# Altium PCB camera.PcbDoc
Units mm, origin at the board's own origin, x right, y up, seen from the top; angles counter-clockwise.
Board outline 152.4 x 101.6 mm, 2 copper layers (Top Layer, Bottom Layer); 45 components, 38 nets, 270 pads, 0 vias.
Unrouted connection lines stored in the file: 134.
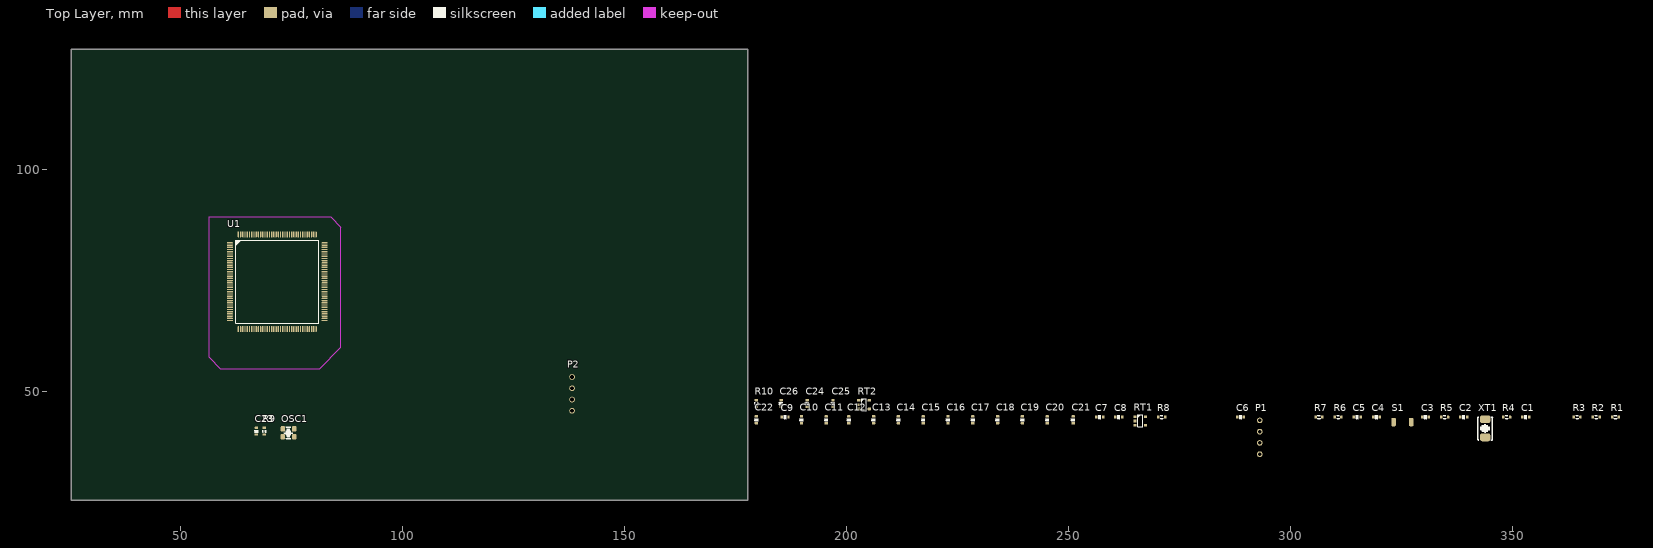
[diagram p0: Top Layer view]
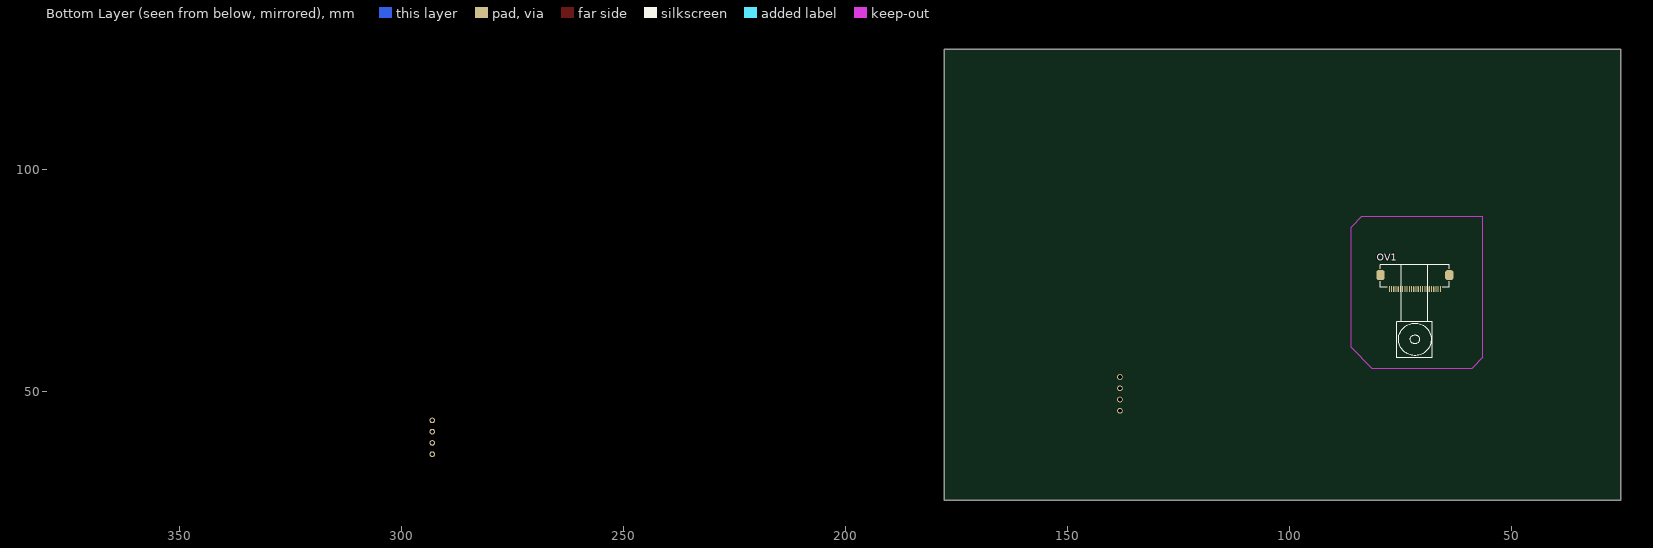
[diagram p1: Bottom Layer view, seen from below]

## Layer stack, top to bottom
Top Solder: solder mask 0.0102, Solder Resist, Dk 3.5
Top Layer: signal copper 0.0356
Dielectric1: dielectric 0.32, FR-4, Dk 4.8
Bottom Layer: signal copper 0.0356
Bottom Solder: solder mask 0.0102, Solder Resist, Dk 3.5

## Board outline
25.4,25.4 177.8,25.4 177.8,127 25.4,127

## Design rules (kind name [scope] priority, off if disabled: settings)
Clearance [All] p1: gap=0.152 ignorepadtopadclearanceinfootprint=FALSE
PolygonConnect [All] p1: connectstyle=Relief reliefconductorwidth=0.254 reliefentries=4 polygonreliefangle="90 Angle" airgapwidth=0.254
RoutingVias [All] p1: holewidth=0.711 width=1.27 viastyle="Through Hole" minholewidth=0.711 minwidth=1.27 maxholewidth=0.711 maxwidth=1.27
SolderMaskExpansion [All] p1: expansion=0.102
Width [All] p1: maxlimit=0.254 minlimit=0.254 preferedwidth=0.254
30 further rules are at their usual default settings.

## Components (designator, comment, footprint, x,y, rotation, side; value= is the part's Value field where it differs from the comment)
C1 "Cap_0603" CAP_0603 353.06,44.196 r0 top value=20pf
C2 "Cap_0603" CAP_0603 339.09,44.196 r0 top value=20pf
C3 "Cap_0603" CAP_0603 330.454,44.196 r0 top value=0.1u
C4 "Cap_0603" CAP_0603 319.405,44.196 r0 top value=0.1u
C5 "Cap_0603" CAP_0603 315.087,44.196 r0 top value=0.1u
C6 "Cap_0603" CAP_0603 288.798,44.196 r0 top value=0.1u
C7 "Cap_0603" CAP_0603 257.048,44.196 r0 top value=1u
C8 "Cap_0603" CAP_0603 261.366,44.196 r0 top value=0.1u
C9 "Cap_0603" CAP_0603 186.182,44.196 r0 top value=0.1u
C10 "Cap_0603" CAP_0603 189.865,43.561 r90 top value=0.1u
C11 "Cap_0603" CAP_0603 195.453,43.561 r90 top value=0.1u
C12 "Cap_0603" CAP_0603 200.533,43.561 r90 top value=0.1u
C13 "Cap_0603" CAP_0603 206.121,43.561 r90 top value=0.1u
C14 "Cap_0603" CAP_0603 211.709,43.561 r90 top value=0.1u
C15 "Cap_0603" CAP_0603 217.297,43.561 r90 top value=0.1u
C16 "Cap_0603" CAP_0603 222.885,43.561 r90 top value=0.1u
C17 "Cap_0603" CAP_0603 228.473,43.561 r90 top value=0.1u
C18 "Cap_0603" CAP_0603 234.061,43.561 r90 top value=0.1u
C19 "Cap_0603" CAP_0603 239.649,43.561 r90 top value=0.1u
C20 "Cap_0603" CAP_0603 245.237,43.561 r90 top value=0.1u
C21 "Cap_0603" CAP_0603 251.079,43.561 r90 top value=0.1u
C22 "Cap_0603" CAP_0603 179.705,43.561 r90 top value=22n
C23 "Cap_0603" CAP_0603 67.056,41.021 r90 top value=0.1u
C24 "Cap_0603" CAP_0603 191.135,47.244 r90 top value=1u
C25 "Cap_0603" CAP_0603 196.977,47.244 r90 top value=0.1u
C26 "Cap_0603" CAP_0603 185.293,47.244 r90 top value=22n
OSC1 "OSC_3225_4P" XT_3225_4 74.295,40.64 r0 top value=?MHz
OV1 "OV7725" ov7725 71.882,68.453 r0 bottom
P1 "HDR1x4_2.54" HDR1X4_2.54_90 293.116,43.434 r0 top
P2 "HDR1x4_2.54" HDR1X4_2.54_90 138.176,53.213 r0 top
R1 "Res_0603" RES_0603 373.253,44.196 r0 top value=10K
R2 "Res_0603" RES_0603 368.935,44.196 r0 top value=10K
R3 "Res_0603" RES_0603 364.617,44.196 r0 top value=10K
R4 "Res_0603" RES_0603 348.742,44.196 r0 top value=1M
R5 "Res_0603" RES_0603 334.772,44.196 r0 top value=10K
R6 "Res_0603" RES_0603 310.769,44.196 r0 top value=10K
R7 "Res_0603" RES_0603 306.451,44.196 r0 top value=10K
R8 "Res_0603" RES_0603 271.018,44.196 r0 top value=10K
R9 "Res_0603" RES_0603 68.834,41.021 r90 top value=10K
R10 "Res_0603" RES_0603 179.705,47.244 r90 top value=10K
RT1 "RT9193" SOT23-5 266.192,43.307 r0 top
RT2 "RT9193" SOT23-5 203.962,46.99 r0 top
S1 "ButtonTACT_3x4x2_180" ButtonTACT_3x4x2_180H 325.247,43.053 r0 top
U1 "STM32F407ZGET6" LQFP_P0.5_144 71.755,74.676 r0 top
XT1 "XTAL_5032_2P" XT_5032_2 343.916,41.656 r90 top value=8M

## Footprints (in the part's own frame and the unit in brackets; to place one, negate y for a bottom-side part, rotate by r counter-clockwise, add the part's x,y. Pads: shape width x height; smd on the part's side, far side on the other; paste and mask are expansions set on the pad)
ButtonTACT_3x4x2_180H [mil]
  round 0 hole 28: 0(0,-35) 0(0,35)
  rrect50% 40x74 smd: 1(-78,0) 2(78,0)
  body extent -79,-49 79,49, height 63
CAP_0603 [mil]
  rrect50% 22x30 smd: 1(-30,0) 2(30,0)
  silkscreen extent -10,-15 10,15, body extent -31,-16 31,16, height 31
HDR1X4_2.54_90 [mil]
  round 50 hole 32: 1(0,0) 2(0,-100) 3(0,-200) 4(0,-300)
  body extent -15,-346 424,46, height 99
LQFP_P0.5_144 [mil]
  oval 54x12 smd: 1(-420,344.49) 2(-420,324.8) 3(-420,305.12) 4(-420,285.43) 5(-420,265.75) 6(-420,246.06) 7(-420,226.38) 8(-420,206.69) 9(-420,187.01) 10(-420,167.32) 11(-420,147.64) 12(-420,127.95) 13(-420,108.27) 14(-420,88.58) 15(-420,68.9) 16(-420,49.21) 17(-420,29.53) 18(-420,9.84) 19(-420,-9.84) 20(-420,-29.53) 21(-420,-49.21) 22(-420,-68.9) 23(-420,-88.58) 24(-420,-108.27) 25(-420,-127.95) 26(-420,-147.64) 27(-420,-167.32) 28(-420,-187.01) 29(-420,-206.69) 30(-420,-226.38) 31(-420,-246.06) 32(-420,-265.75) 33(-420,-285.43) 34(-420,-305.12) 35(-420,-324.8) 36(-420,-344.49) 73(420,-344.49) 74(420,-324.8) 75(420,-305.12) 76(420,-285.43) 77(420,-265.75) 78(420,-246.06) 79(420,-226.38) 80(420,-206.69) 81(420,-187.01) 82(420,-167.32) 83(420,-147.64) 84(420,-127.95) 85(420,-108.27) 86(420,-88.58) 87(420,-68.9) 88(420,-49.21) 89(420,-29.53) 90(420,-9.84) 91(420,9.84) 92(420,29.53) 93(420,49.21) 94(420,68.9) 95(420,88.58) 96(420,108.27) 97(420,127.95) 98(420,147.64) 99(420,167.32) 100(420,187.01) 101(420,206.69) 102(420,226.38) 103(420,246.06) 104(420,265.75) 105(420,285.43) 106(420,305.12) 107(420,324.8) 108(420,344.49)
  oval 12x54 smd: 37(-344.49,-420) 38(-324.8,-420) 39(-305.12,-420) 40(-285.43,-420) 41(-265.75,-420) 42(-246.06,-420) 43(-226.38,-420) 44(-206.69,-420) 45(-187.01,-420) 46(-167.32,-420) 47(-147.64,-420) 48(-127.95,-420) 49(-108.27,-420) 50(-88.58,-420) 51(-68.9,-420) 52(-49.21,-420) 53(-29.53,-420) 54(-9.84,-420) 55(9.84,-420) 56(29.53,-420) 57(49.21,-420) 58(68.9,-420) 59(88.58,-420) 60(108.27,-420) 61(127.95,-420) 62(147.64,-420) 63(167.32,-420) 64(187.01,-420) 65(206.69,-420) 66(226.38,-420) 67(246.06,-420) 68(265.75,-420) 69(285.43,-420) 70(305.12,-420) 71(324.8,-420) 72(344.49,-420) 109(344.49,420) 110(324.8,420) 111(305.12,420) 112(285.43,420) 113(265.75,420) 114(246.06,420) 115(226.38,420) 116(206.69,420) 117(187.01,420) 118(167.32,420) 119(147.64,420) 120(127.95,420) 121(108.27,420) 122(88.58,420) 123(68.9,420) 124(49.21,420) 125(29.53,420) 126(9.84,420) 127(-9.84,420) 128(-29.53,420) 129(-49.21,420) 130(-68.9,420) 131(-88.58,420) 132(-108.27,420) 133(-127.95,420) 134(-147.64,420) 135(-167.32,420) 136(-187.01,420) 137(-206.69,420) 138(-226.38,420) 139(-246.06,420) 140(-265.75,420) 141(-285.43,420) 142(-305.12,420) 143(-324.8,420) 144(-344.49,420)
  silkscreen extent -370,-370 370,370, body extent -433,-433 433,433, height 63
ov7725 [mil]
  rrect50% 72x86 smd: 0(-311,-304) 0(299,-304)
  rrect50% 10x50 smd: 1(-232.38,-180.02) 2(-212.69,-180.02) 3(-193.01,-180.02) 4(-173.32,-180.02) 5(-153.64,-180.02) 6(-133.95,-180.02) 7(-114.27,-180.02) 8(-94.58,-180.02) 9(-74.9,-180.02) 10(-55.21,-180.02) 11(-35.53,-180.02) 12(-15.84,-180.02) 13(3.84,-180.02) 14(23.53,-180.02) 15(43.21,-180.02) 16(62.9,-180.02) 17(82.58,-180.02) 18(102.27,-180.02) 19(121.95,-180.02) 20(141.64,-180.02) 21(161.32,-180.02) 22(181.01,-180.02) 23(200.69,-180.02) 24(220.38,-180.02)
  silkscreen extent -311,-394 299,431, body extent -350,-399 338,-189, height 82
RES_0603 [mil]
  rrect50% 22x30 smd: 1(-30,0) 2(30,0)
  silkscreen extent -10,-16 10,16, body extent -31,-16 31,16, height 18
SOT23-5 [mil]
  rrect50% 30x24 smd: 1(-47,38) 2(-47,0) 3(-47,-38) 4(47,-38) 5(47,38)
  silkscreen extent -21,-53 21,53, body extent -55,-57 55,57, height 57
XT_3225_4 [mil]
  rrect50% 40x48 smd: 1(-50,-35) 2(50,-35) 3(50,35) 4(-50,35)
  silkscreen extent -38,-54 38,54, body extent -63,-49 63,49, height 41
XT_5032_2 [mil]
  rrect50% 70x90 smd: 1(-80,0) 2(80,0)
  silkscreen extent -104,-68 104,68, body extent -98,-63 98,63, height 39

## Part data
C1 C2 C3 C4 C5 C6 C7 C8 C9 C10 C11 C12 C13 C14 C15 C16 C17 C18 C19 C20 C21 C22 C23 C24 C25 C26: "Capacitor"
OSC1 XT1: "Crystal Oscillator"
P1 P2: "Header"
R1 R2 R3 R4 R5 R6 R7 R8 R9 R10: "Resistor"
RT1 RT2: "Power"
S1: "Button"
U1: library part Component_1

## Nets (pads, with @x,y where several pads share a name; then routed paths per layer and width w, separated by ;. In a path a pad name is that pad's centre, name@x,y a point inside that pad or via, vN(x,y) a via of type N, cw(c..) or ccw(c..) an arc to the next point about the centre after c; other vN are vias at no path point)
1V8: C8.2 OV1.10 RT1.5
2V8: C25.2 OV1.4 OV1.11 RT2.5
3V3: C6.1 C7.2 C9.2 C10.2 C11.2 C12.2 C13.2 C14.2 C15.2 C16.2 C17.2 C18.2 C19.2 C20.2 C21.2 C23.2 C24.2 OSC1.4 P1.1 P2.1 R2.1 R3.1 R5.1 R6.2 R9.2 RT1.1 RT1.3 U1.6 U1.17 U1.30 U1.32 U1.33 U1.39 U1.52 U1.62 U1.72 U1.84 U1.95 U1.108 U1.121 U1.131 U1.144
DGND: OV1.15 R10.2
GND: C1.1 C2.1 C3.1 C4.1 C5.1 C7.1 C8.1 C9.1 C10.1 C11.1 C12.1 C13.1 C14.1 C15.1 C16.1 C17.1 C18.1 C19.1 C20.1 C21.1 C22.1 C23.1 C24.1 C25.1 C26.1 OSC1.1 OSC1.2 OV1.2 P1.2 P2.4 R1.2 R7.2 R8.1 R10.1 RT1.2 RT2.2 S1.2 U1.16 U1.38 U1.51 U1.61 U1.83 U1.94 U1.120 U1.130
HREF: OV1.9 U1.40
NetC1_2: C1.2 R4.1 U1.23 XT1.1
NetC2_2: C2.2 R4.2 U1.24 XT1.2
NetC4_2: C4.2 U1.71
NetC5_2: C5.2 U1.106
NetC6_2: C6.2 U1.31
NetC22_2: C22.2 RT1.4
NetC26_2: C26.2 RT2.4
NetR1_1: R1.1 U1.48
NetR8_2: R8.2 U1.138
NetR9_1: R9.1 U1.143
NRST: C3.2 R5.2 S1.1 U1.25
PCLK: OV1.17 U1.42
PWDN: OV1.8
RESET: OV1.6
RXD: P1.3 U1.102
SCL: OV1.5 R2.2 U1.139
SDA: OV1.3 R3.2 U1.140
SWCLK: P2.3 R7.1 U1.109
SWDIO: P2.2 R6.1 U1.105
TXD: P1.4 U1.101
VSYNC: OV1.7 U1.137
XCLK1: OSC1.3 OV1.13
Y0: OV1.24 U1.96
Y1: OV1.23 U1.97
Y2: OV1.19 U1.98 U1.141
Y3: OV1.21 U1.99 U1.142
Y4: OV1.22 U1.3
Y5: OV1.20 U1.136
Y6: OV1.18 U1.4
Y7: OV1.16 U1.5
Y8: OV1.14 U1.111
Y9: OV1.12 U1.113
pads on no net: OV1.0 OV1.1 RT2.1 RT2.3 S1.0 U1.1 U1.2 U1.7 U1.8 U1.9 U1.10 U1.11 U1.12 U1.13 U1.14 U1.15 U1.18 U1.19 U1.20 U1.21 U1.22 U1.26 U1.27 U1.28 U1.29 U1.34 U1.35 U1.36 U1.37 U1.41 U1.43 U1.44 U1.45 U1.46 U1.47 U1.49 U1.50 U1.53 U1.54 U1.55 U1.56 U1.57 U1.58 U1.59 U1.60 U1.63 U1.64 U1.65 U1.66 U1.67 U1.68 U1.69 U1.70 U1.73 U1.74 U1.75 U1.76 U1.77 U1.78 U1.79 U1.80 U1.81 U1.82 U1.85 U1.86 U1.87 U1.88 U1.89 U1.90 U1.91 U1.92 U1.93 U1.100 U1.103 U1.104 U1.107 U1.110 U1.112 U1.114 U1.115 U1.116 U1.117 U1.118 U1.119 U1.122 U1.123 U1.124 U1.125 U1.126 U1.127 U1.128 U1.129 U1.132 U1.133 U1.134 U1.135

## Keep-outs
Keep-Out Layer:
  lines w0.254: 56.388,57.658 56.388,89.281 83.82,89.281 86.106,86.995 86.106,59.944 81.28,55.118 58.928,55.118 56.388,57.658